# Altium PCB PCB1.PcbDoc
Units mil, origin at the board's own origin, x right, y up, seen from the top; angles counter-clockwise.
Board outline 6000 x 4000 mil, 2 copper layers (Top Layer, Bottom Layer); 15 components, 43 nets, 139 pads, 9 vias.
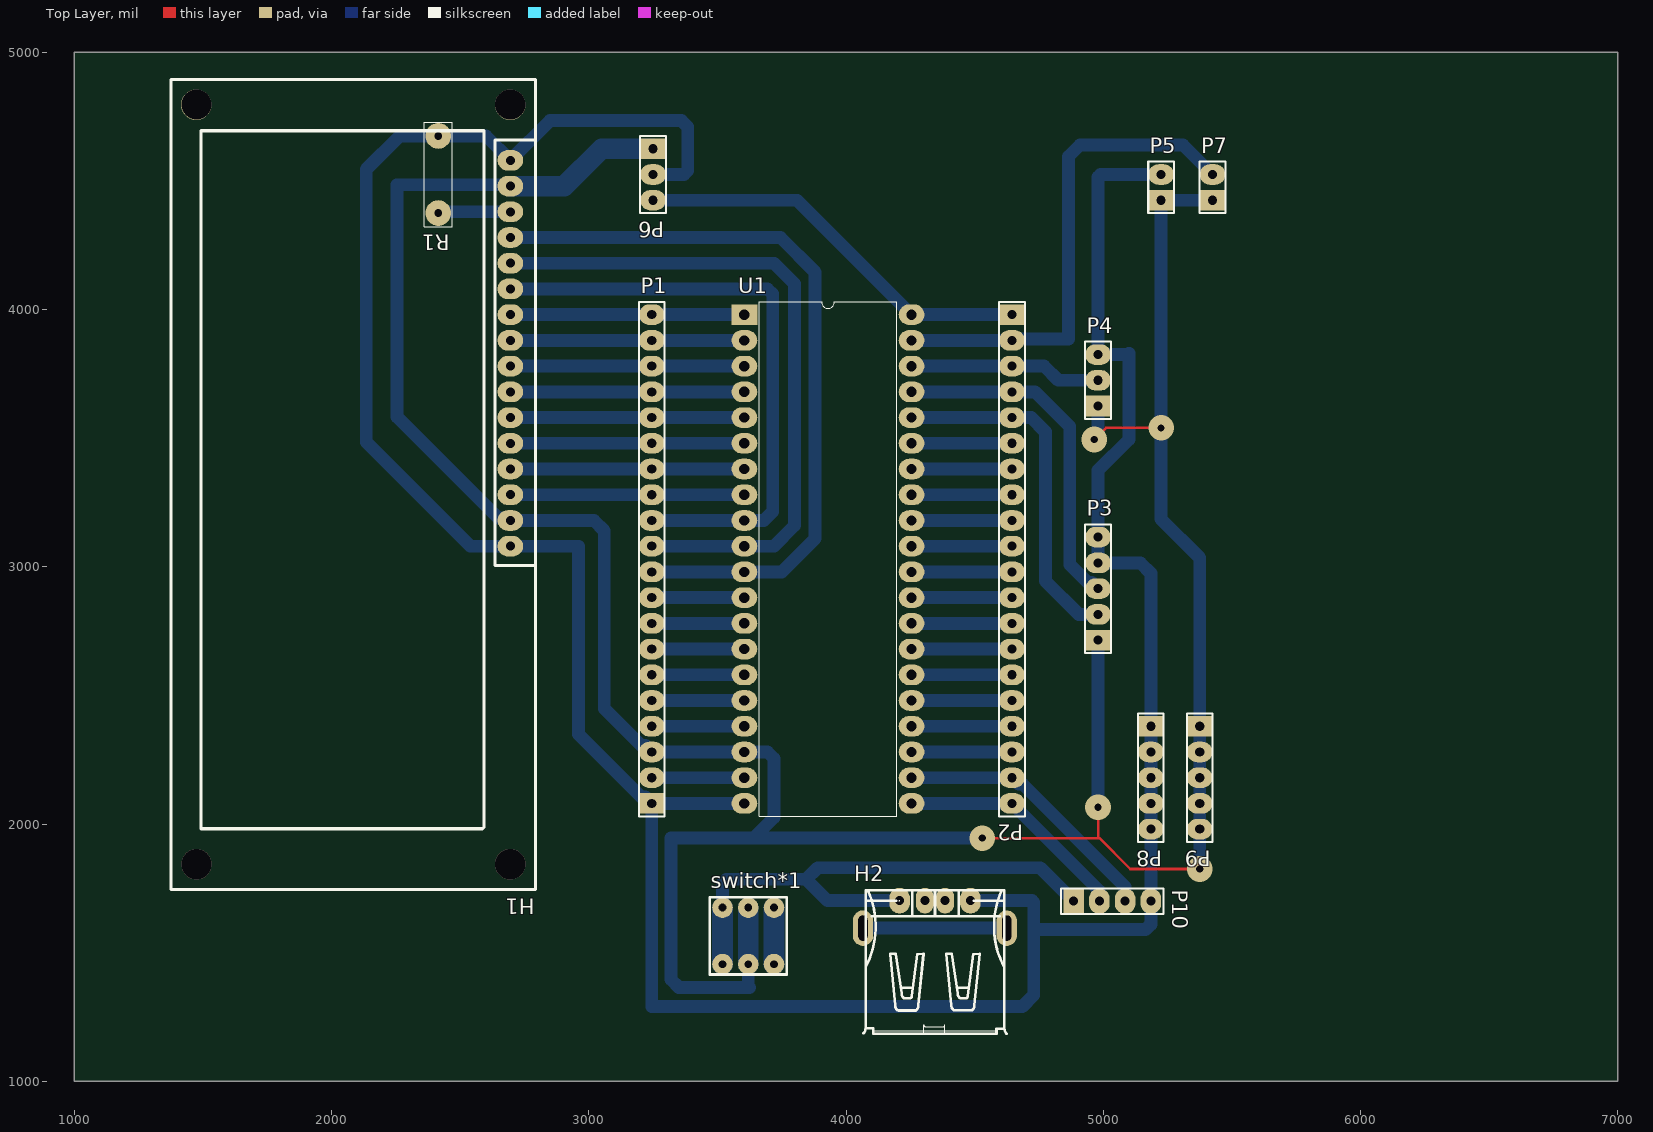
[diagram p0: Top Layer view]
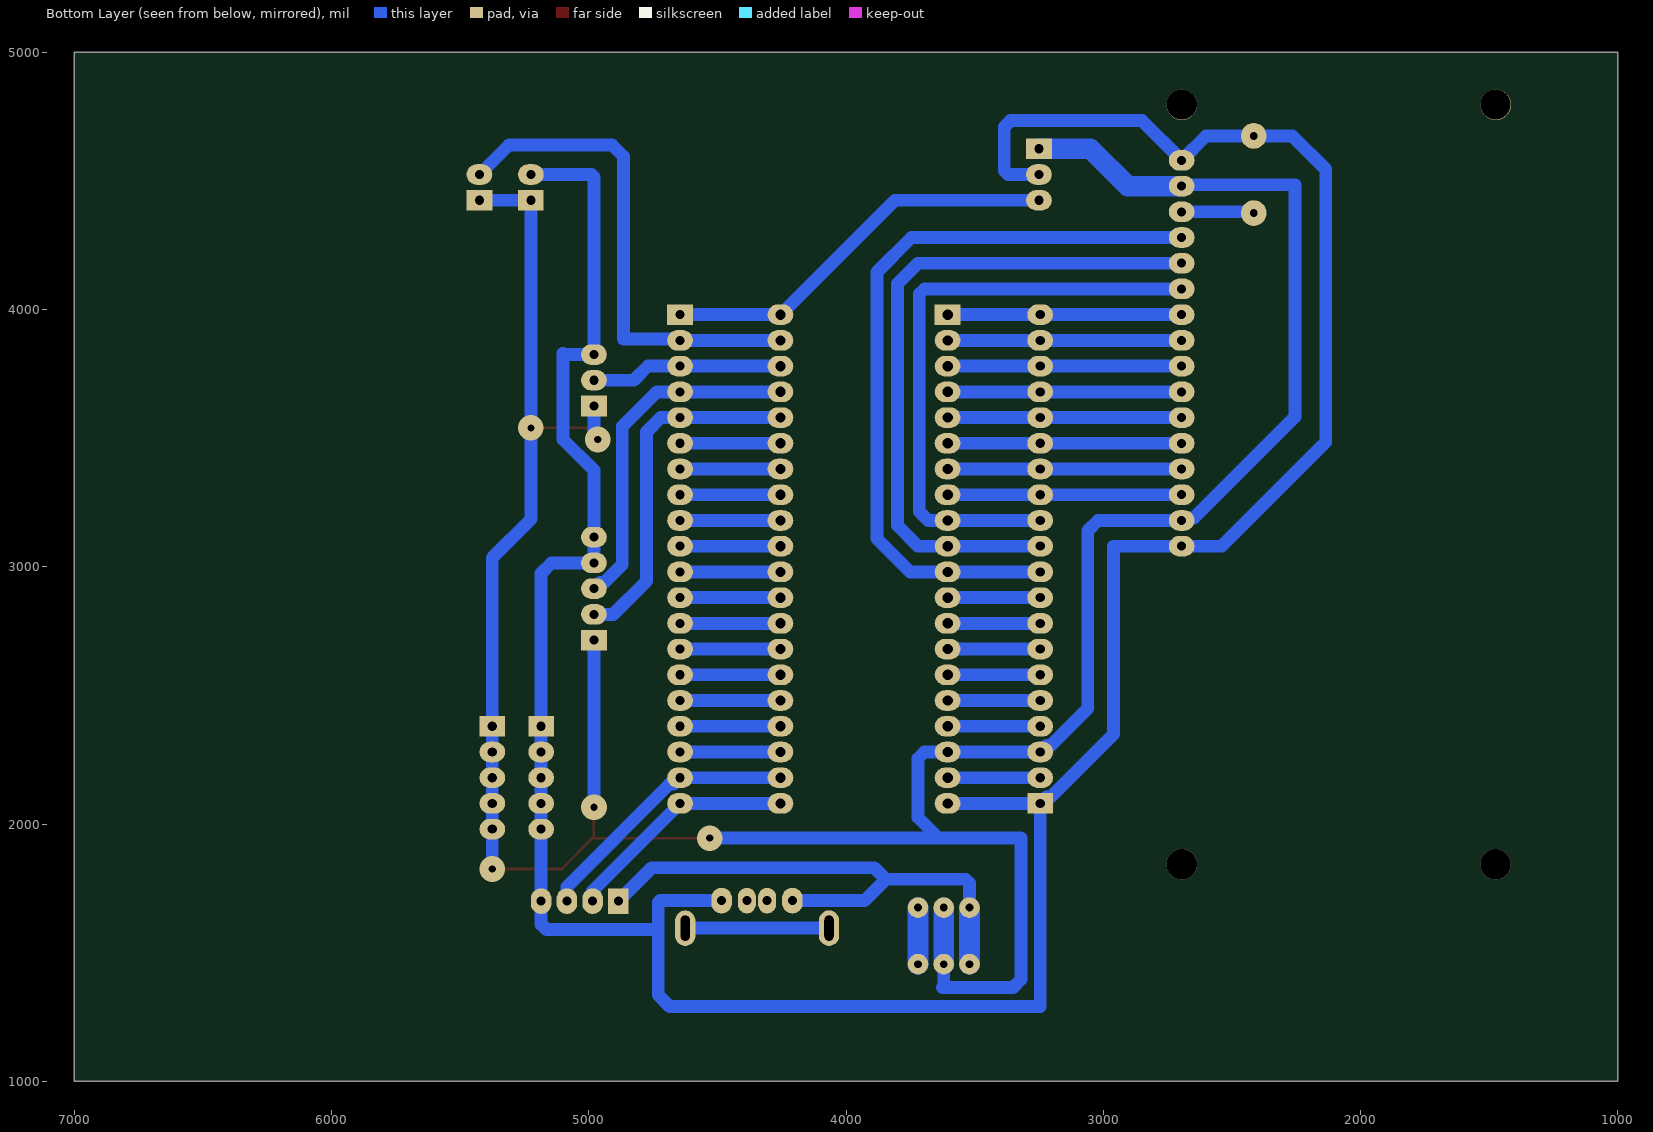
[diagram p1: Bottom Layer view, seen from below]

## Layer stack, top to bottom
Top Solder: solder mask 0.4, Solder Resist, Dk 3.5
Top Layer: signal copper 1.4
Dielectric 1: dielectric 12.6, FR-4, Dk 4.8
Bottom Layer: signal copper 1.4
Bottom Solder: solder mask 0.4, Solder Resist, Dk 3.5

## Board outline
1000,1000 7000,1000 7000,5000 1000,5000

## Design rules (kind name [scope] priority, off if disabled: settings)
Clearance [All] p1: gap=10 ignorepadtopadclearanceinfootprint=FALSE except(0: Arc-Hole Track-Hole SMDPad-Hole THPad-Hole Via-Hole Fill-Hole Poly-Hole Region-Hole Text-Hole)
PolygonConnect [All] p1: connectstyle=Relief reliefconductorwidth=10 reliefentries=4 polygonreliefangle="90 Angle" airgapwidth=10
RoutingVias [All] p1: holewidth=28 width=50 viastyle="Through Hole" minholewidth=28 minwidth=50 maxholewidth=28 maxwidth=100
SolderMaskExpansion [All] p1: expansion=4
Width [All] p1: maxlimit=100 minlimit=10 preferedwidth=50 toplayer_maxwidth=10 toplayer_prefwidth=10 bottomlayer_minwidth=30 minimp=50.000000 maximp=50.000000 favimp=50.000000
30 further rules are at their usual default settings.

## Components (designator, comment, footprint, x,y, rotation, side; value= is the part's Value field where it differs from the comment)
H1 "LCD1602" H_LCD(1602) 2095,3380 r270 top
H2 "USB-A" USB-A 4346,1702 r0 top
P1 "Header 20" HDR1X20 3245,2080 r90 top
P2 "Header 20" HDR1X20 4645,3980 r270 top
P3 "Header LIGHT" HDR1X5 4980,2715 r90 top
P4 "Header TEMP" HDR1X3 4980,3625 r90 top
P5 "Header 2" HDR1X2 5225,4425 r90 top
P6 "Header JDQ" HDR1X3 3250,4625 r270 top
P7 "Header LED" HDR1X2 5425,4425 r90 top
P8 "Header 5" HDR1X5 5185,2380 r270 top
P9 "Header 5" HDR1X5 5375,2380 r270 top
P10 "Header UART" HDR1X4 4885,1700 r0 top
R1 "RES" RES_IP 2415,4675 r270 top
switch*1 "switch*" switch 3470,1415 r90 top
U1 "STC15W4K60S4_PDIP40" DIP40 3605,3980 r0 top

## Footprints (in the part's own frame and the unit in brackets; to place one, negate y for a bottom-side part, rotate by r counter-clockwise, add the part's x,y. Pads: shape width x height; smd on the part's side, far side on the other; paste and mask are expansions set on the pad)
DIP40 [mil]
  rect 100x80 hole 40: 1(0,0)
  oval 100x80 hole 40: 2(0,-100) 3(0,-200) 4(0,-300) 5(0,-400) 6(0,-500) 7(0,-600) 8(0,-700) 9(0,-800) 10(0,-900) 11(0,-1000) 12(0,-1100) 13(0,-1200) 14(0,-1300) 15(0,-1400) 16(0,-1500) 17(0,-1600) 18(0,-1700) 19(0,-1800) 20(0,-1900) 21(650,-1900) 22(650,-1800) 23(650,-1700) 24(650,-1600) 25(650,-1500) 26(650,-1400) 27(650,-1300) 28(650,-1200) 29(650,-1100) 30(650,-1000) 31(650,-900) 32(650,-800) 33(650,-700) 34(650,-600) 35(650,-500) 36(650,-400) 37(650,-300) 38(650,-200) 39(650,-100) 40(650,0)
  silkscreen extent 58,-1950 592,50
H_LCD(1602) [mil]
  oval 80x100 hole 35: 1(-1200,600) 2(-1100,600) 3(-1000,600) 4(-900,600) 5(-800,600) 6(-700,600) 7(-600,600) 8(-500,600) 9(-400,600) 10(-300,600) 11(-200,600) 12(-100,600) 13(0,600) 14(100,600) 15(200,600) 16(300,600)
  silkscreen extent -1515,-719 1635,698
HDR1X2 [mil] "Connector; Header; 2 Position"
  rect 80x100 hole 35.43: 1(0,0)
  oval 80x100 hole 35.43: 2(100,0)
  silkscreen extent -50,-50 150,50
HDR1X3 [mil] "Connector; Header; 3 Position"
  rect 80x100 hole 35.43: 1(0,0)
  oval 80x100 hole 35.43: 2(100,0) 3(200,0)
  silkscreen extent -50,-50 250,50
HDR1X4 [mil] "Connector; Header; 4 Position"
  rect 80x100 hole 35.43: 1(0,0)
  oval 80x100 hole 35.43: 2(100,0) 3(200,0) 4(300,0)
  silkscreen extent -50,-50 350,50
HDR1X5 [mil] "Connector; Header; 5 Position"
  rect 80x100 hole 35.43: 1(0,0)
  oval 80x100 hole 35.43: 2(100,0) 3(200,0) 4(300,0) 5(400,0)
  silkscreen extent -50,-50 450,50
HDR1X20 [mil] "Connector; Header; 20 Position"
  rect 80x100 hole 35.43: 1(0,0)
  oval 80x100 hole 35.43: 2(100,0) 3(200,0) 4(300,0) 5(400,0) 6(500,0) 7(600,0) 8(700,0) 9(800,0) 10(900,0) 11(1000,0) 12(1100,0) 13(1200,0) 14(1300,0) 15(1400,0) 16(1500,0) 17(1600,0) 18(1700,0) 19(1800,0) 20(1900,0)
  silkscreen extent -50,-50 1950,50
RES_IP [mil]
  round 100 hole 30: 1(0,0) 2(300,0)
  silkscreen extent -53,-54 353,54
switch [mil]
  round 80 hole 30: 0(40,-50) 0(260,-50) 1(40,-150) 1(260,-150) 2(40,-250) 2(260,-250)
  Bottom Layer lines w80: 40,-50 260,-50 ; 40,-150 260,-150 ; 40,-250 260,-250
  silkscreen extent 0,-300 300,0
USB-A [mm]
  oval 2.032x2.54 hole 0.9: 1(-3.5,0) 4(3.5,0)
  oval 1.778x2.54 hole 0.9: 2(-1,0) 3(1,0)
  oval 2x3.5 hole 0.9 slot 2.5 at 90 deg: 5(-7.112,-2.713) 6(7.087,-2.718)
  silkscreen extent -7.06,-13.13 7.06,1.02

## Part data
P1 P2: "Header, 20-Pin", LatestRevisionDate=17-Jul-2002, LatestRevisionNote="Re-released for DXP Platform.", Publisher="Altium Limited"
P3: library part "Header 5", "Header, 5-Pin", LatestRevisionDate=17-Jul-2002, LatestRevisionNote="Re-released for DXP Platform.", Publisher="Altium Limited"
P4 P6: library part "Header 3", "Header, 3-Pin", LatestRevisionDate=17-Jul-2002, LatestRevisionNote="Re-released for DXP Platform.", Publisher="Altium Limited"
P5: "Header, 2-Pin", LatestRevisionDate=17-Jul-2002, LatestRevisionNote="Re-released for DXP Platform.", Publisher="Altium Limited"
P7: library part "Header 2", "Header, 2-Pin", LatestRevisionDate=17-Jul-2002, LatestRevisionNote="Re-released for DXP Platform.", Publisher="Altium Limited"
P8 P9: "Header, 5-Pin", LatestRevisionDate=17-Jul-2002, LatestRevisionNote="Re-released for DXP Platform.", Publisher="Altium Limited"
P10: library part "Header 4", "Header, 4-Pin", LatestRevisionDate=17-Jul-2002, LatestRevisionNote="Re-released for DXP Platform.", Publisher="Altium Limited"
switch*1: library part switch

## Via types
v1: diameter 100, hole 28, Top Layer to Bottom Layer, 5 vias
v2: diameter 118.11, hole 117.32, Top Layer to Bottom Layer, 3 vias
v3: diameter 117.32, hole 117.32, Top Layer to Bottom Layer, 1 vias

## Nets (pads, with @x,y where several pads share a name; then routed paths per layer and width w, separated by ;. In a path a pad name is that pad's centre, name@x,y a point inside that pad or via, vN(x,y) a via of type N, cw(c..) or ccw(c..) an arc to the next point about the centre after c; other vN are vias at no path point)
1602E: H1.6 P1.12 U1.9 | length 2357.8
  Bottom Layer w50: H1.6 3695,4080 3715,4060 3715,3215 3680,3180 U1.9 P1.12
1602RS: H1.4 P1.10 U1.11 | length 2964.8
  Bottom Layer w50: H1.4 3745,4280 3880,4145 3880,3110 3750,2980 U1.11 P1.10
1602RW: H1.5 P1.11 U1.10 | length 2666.3
  Bottom Layer w50: H1.5 3720,4180 3800,4100 3800,3160 3720,3080 U1.10 P1.11
GND: H1.1 H1.16 H2.4 P1.1 P3.4 P3.5 P4.3 P5.2 P6.2 P8.1 P8.2 P8.3 P8.4 P8.5 P10.4 R1.1 U1.20 | length 12147.7
  Bottom Layer w50: P6.2 3370,4525 3385,4540 3385,4710 3360,4735 2850,4735 H1.1 2600,4675 R1.1 2265,4675 2135,4545 2135,3485 2540,3080 H1.16 2960,3080 2960,2348.93 3203.93,2105 3220,2105 P1.1 ; U1.20 P1.1 ; H2.4 4723,1702 4730,1695 4730,1590 ; P5.2 4990,4525 4980,4515 P4.3 5095,3825 5100,3830 5100,3495 4980,3375 P3.5 P3.4 5145,3015 5185,2975 P8.1 P8.2 P8.3 P8.4 P8.5 P10.4 5185,1610 5165,1590 4730,1590 ; P1.1 3245,1290 4685,1290 4730,1335 4730,1590
JDQ: P2.1 P6.3 U1.40 | length 1549.3
  Bottom Layer w50: P6.3 3810,4425 U1.40 P2.1@4615,3980
LED: P2.2 P7.2 U1.39 | length 1918.3
  Bottom Layer w50: U1.39 P2.2@4615,3880 ; P2.2 4650,3885 4865,3885 4865,4595 4910,4640 5310,4640 P7.2
NetH1_3: H1.3 R1.2 | length 282.1
  Bottom Layer w50: R1.2 2420,4380 H1.3
NetH1_7: H1.7 P1.20 U1.1 | length 910
  Bottom Layer w50: H1.7 P1.20 U1.1
NetH1_8: H1.8 P1.19 U1.2 | length 910
  Bottom Layer w50: H1.8 P1.19 U1.2
NetH1_9: H1.9 P1.18 U1.3 | length 910
  Bottom Layer w50: H1.9 P1.18 U1.3
NetH1_10: H1.10 P1.17 U1.4 | length 910
  Bottom Layer w50: H1.10 P1.17 U1.4
NetH1_11: H1.11 P1.16 U1.5 | length 910
  Bottom Layer w50: H1.11 P1.16 U1.5
NetH1_12: H1.12 P1.15 U1.6 | length 910
  Bottom Layer w50: H1.12 P1.15 U1.6
NetH1_13: H1.13 P1.14 U1.7 | length 910
  Bottom Layer w50: H1.13 P1.14 U1.7
NetH1_14: H1.14 P1.13 U1.8 | length 910
  Bottom Layer w50: H1.14 P1.13 U1.8
NetH2_1: H2.1 P10.1 switch*1.0 | length 1936.3
  Bottom Layer w50: switch*1.0@3520,1675 3520,1770 3535,1785 3845,1785 ; H2.1 3928,1702 3845,1785 ; P10.1 4755,1830 3890,1830 3845,1785
NetH2_5: H2.5 H2.6 | length 559.1
  Bottom Layer w50: H2.5 4624.8,1595.2 H2.6
NetP1_2: P1.2 U1.19 | length 360
  Bottom Layer w50: P1.2 U1.19
NetP1_4: P1.4 U1.17 | length 360
  Bottom Layer w50: P1.4 U1.17
NetP1_5: P1.5 U1.16 | length 360
  Bottom Layer w50: P1.5 U1.16
NetP1_6: P1.6 U1.15 | length 360
  Bottom Layer w50: P1.6 U1.15
NetP1_7: P1.7 U1.14 | length 360
  Bottom Layer w50: P1.7 U1.14
NetP1_8: P1.8 U1.13 | length 360
  Bottom Layer w50: P1.8 U1.13
NetP1_9: P1.9 U1.12 | length 360
  Bottom Layer w50: P1.9 U1.12
NetP2_6: P2.6 U1.35 | length 360
  Bottom Layer w50: U1.35 P2.6@4615,3480
NetP2_7: P2.7 U1.34 | length 360
  Bottom Layer w50: U1.34 P2.7@4615,3380
NetP2_8: P2.8 U1.33 | length 360
  Bottom Layer w50: U1.33 P2.8@4615,3280
NetP2_9: P2.9 U1.32 | length 360
  Bottom Layer w50: U1.32 P2.9@4615,3180
NetP2_10: P2.10 U1.31 | length 360
  Bottom Layer w50: U1.31 P2.10@4615,3080
NetP2_11: P2.11 U1.30 | length 360
  Bottom Layer w50: U1.30 P2.11@4615,2980
NetP2_12: P2.12 U1.29 | length 360
  Bottom Layer w50: U1.29 P2.12@4615,2880
NetP2_13: P2.13 U1.28 | length 360
  Bottom Layer w50: U1.28 P2.13@4615,2780
NetP2_14: P2.14 U1.27 | length 360
  Bottom Layer w50: U1.27 P2.14@4615,2680
NetP2_15: P2.15 U1.26 | length 360
  Bottom Layer w50: U1.26 P2.15@4615,2580
NetP2_16: P2.16 U1.25 | length 360
  Bottom Layer w50: U1.25 P2.16@4615,2480
NetP2_17: P2.17 U1.24 | length 360
  Bottom Layer w50: U1.24 P2.17@4615,2380
NetP2_18: P2.18 U1.23 | length 360
  Bottom Layer w50: U1.23 P2.18@4615,2280
RXD: P2.20 P10.2 U1.21 | length 880.8
  Bottom Layer w50: U1.21 P2.20@4615,2080 ; P2.20 4985,1740 P10.2
SCL: P2.5 P3.2 U1.36 | length 1351.6
  Bottom Layer w50: U1.36 P2.5@4615,3580 ; P2.5 4720,3580 4775,3525 4775,2945 4905,2815 P3.2
SDA: P2.4 P3.3 U1.37 | length 1325.9
  Bottom Layer w50: U1.37 P2.4@4615,3680 ; P2.4 4735,3680 4870,3545 4870,3008.93 4938.93,2940 4955,2940 P3.3
TEMP: P2.3 P4.2 U1.38 | length 717.8
  Bottom Layer w50: U1.38 P2.3@4615,3780 ; P2.3 4770,3780 4825,3725 P4.2
TXD: P2.19 P10.3 U1.22 | length 1031.7
  Bottom Layer w50: U1.22 P2.19@4615,2180 ; P2.19 4670,2155 4686.07,2155 5085,1756.07 P10.3
VCC: H1.2 H1.15 P1.3 P3.1 P4.1 P5.1 P6.1 P7.1 P9.1 P9.2 P9.3 P9.4 P9.5 switch*1.1 U1.18 | length 11859.7
  Top Layer w10: v1(4530,1945) 4985,1945 ; v1@4960,3490 v1(4965,3495) 5010,3540 v1(5225,3540) ; v1(4980,2065) 4980,1950 4985,1945 ; v1@5385,1825 v1(5375,1825) 5105,1825 4985,1945
  Bottom Layer w50: H1.2 2690,4485 2255,4485 2255,3582.72 2647.72,3190 2685,3190 H1.15 3020,3180 3060,3140 3060,2448.93 3203.93,2305 3220,2305 P1.3 U1.18 3695,2280 3720,2255 3720,2025 3640,1945 ; switch*1.1@3620,1455 3620,1370 3625,1365 3350,1365 3320,1395 3320,1945 3640,1945 ; v1(4530,1945) 3640,1945 ; v1(4965,3495) 4980,3510 P4.1 ; v1@4975,2060 v1(4980,2065) P3.1 ; v1(5375,1825) P9.5 P9.4 P9.3 P9.2 P9.1 5375,3035 5225,3185 v1(5225,3540) P5.1 P7.1
  Bottom Layer w80: H1.2 2905,4480 3050,4625 P6.1
pads on no net: H2.2 H2.3 switch*1.2
copper on no net:
  other v2: 2695,1843.78 1474.53,4796.54 2695,4796.54
  other v3: 1474.53,1843.78